# Altium PCB PCB1.PcbDoc
Units mm, origin at the board's own origin, x right, y up, seen from the top; angles counter-clockwise.
Board outline 42.06 x 62 mm, 2 copper layers (Top Layer, Bottom Layer), stack 1.57 mm thick; 55 components, 38 nets, 157 pads, 319 vias.
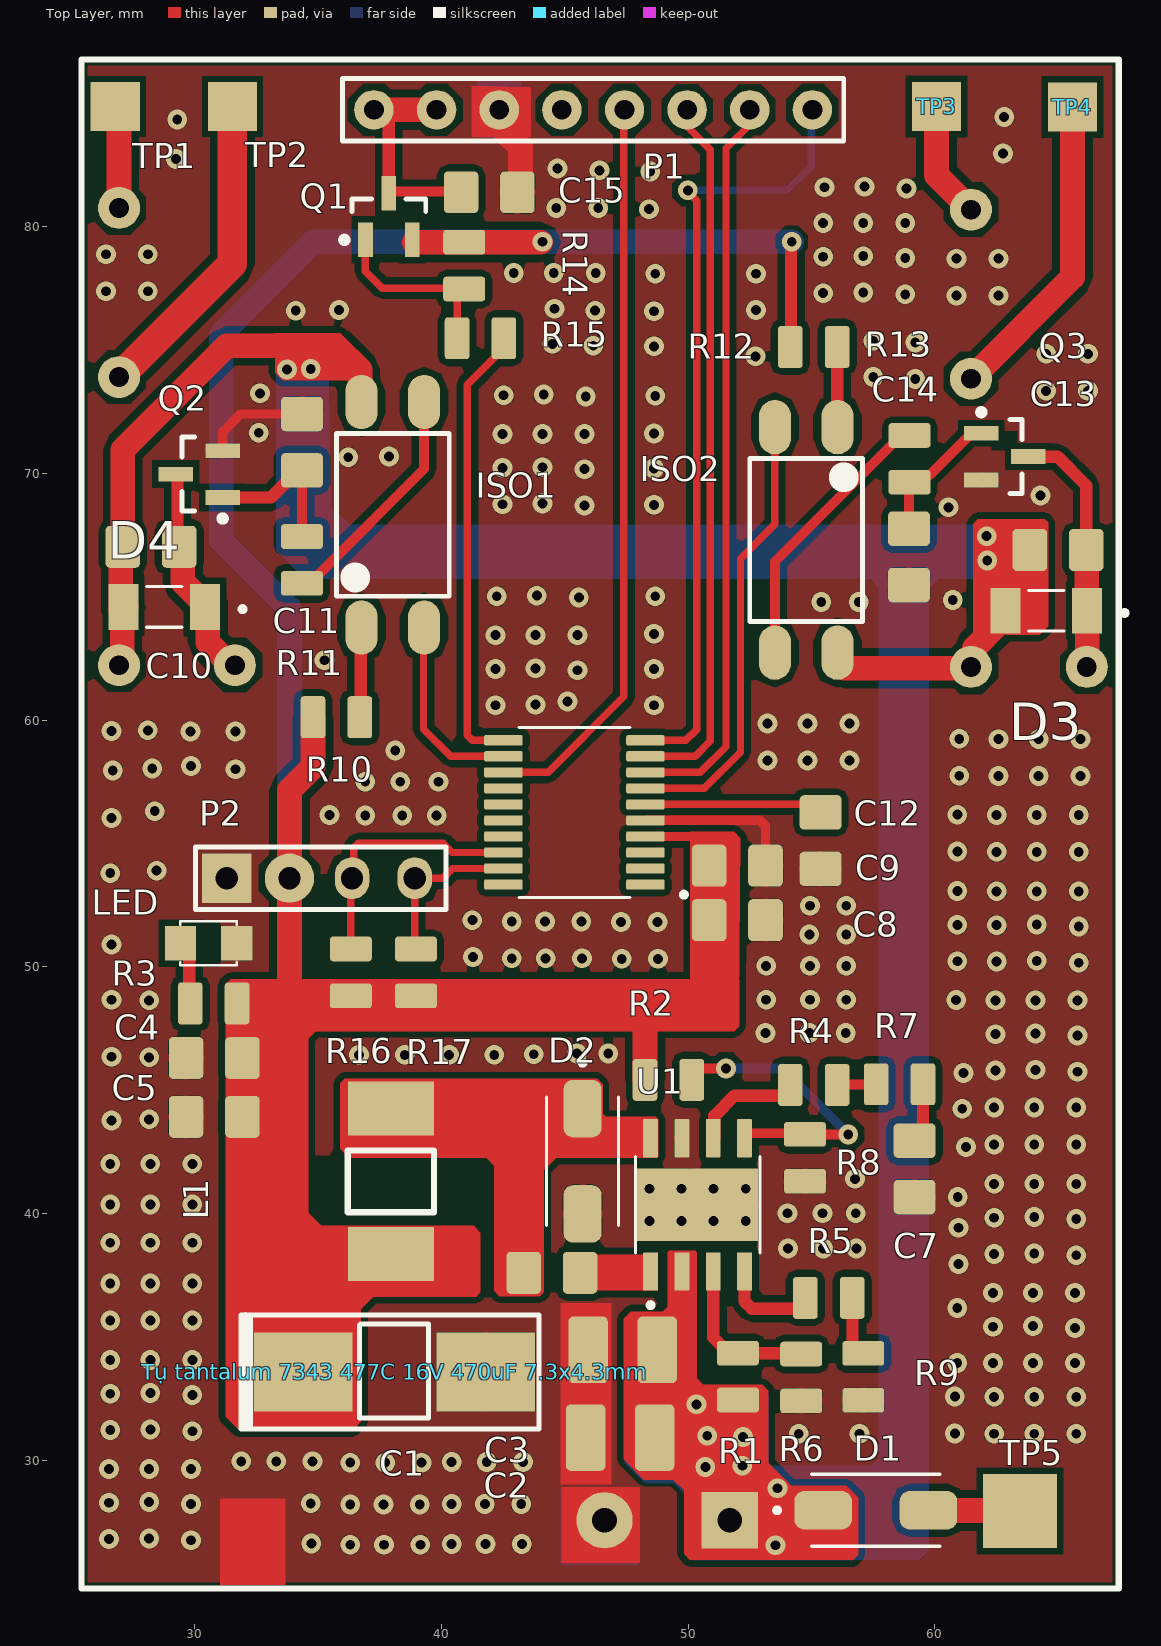
[diagram p0: Top Layer view]
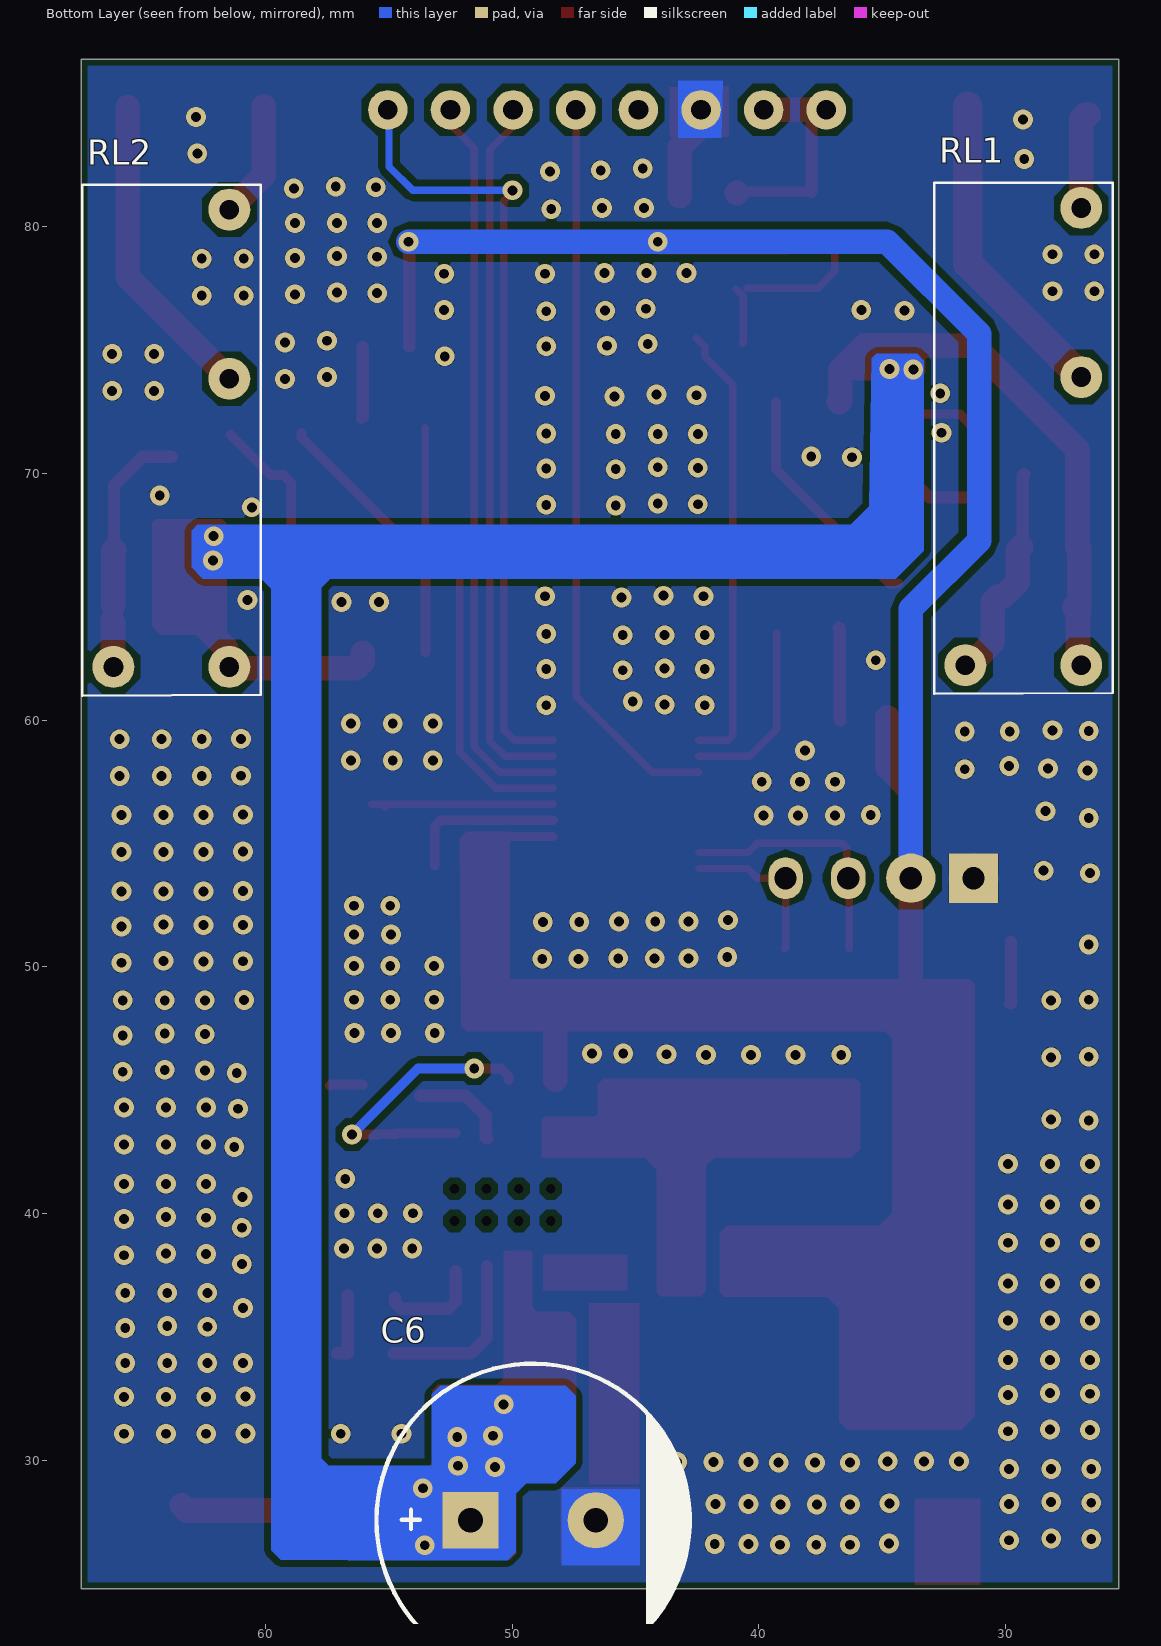
[diagram p1: Bottom Layer view, seen from below]
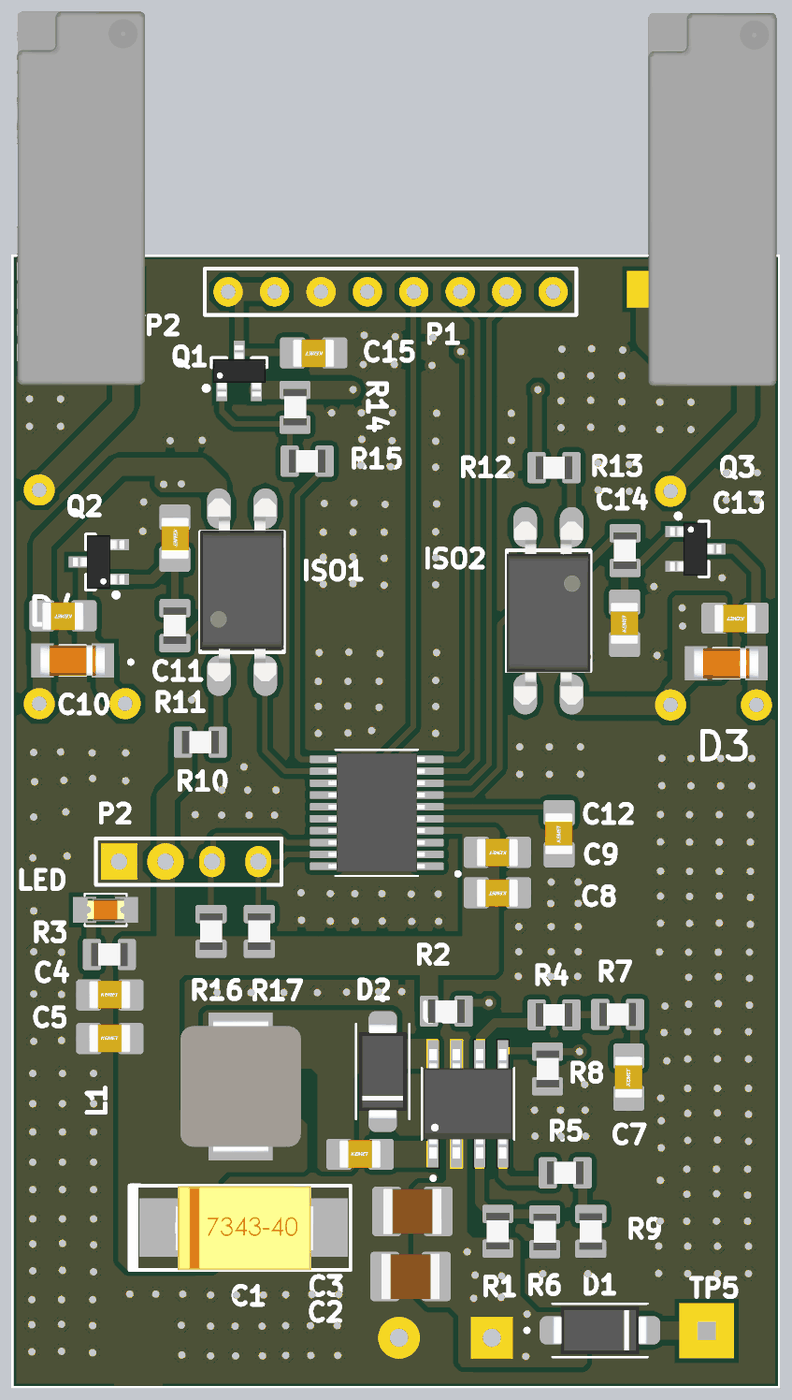
[diagram p2: 3D render of the assembled board from above, using the file's embedded part models]

## Layer stack, top to bottom
Top Solder: solder mask 0.01, Solder Resist, Dk 3.5
Top Layer: signal copper 0.035
Dielectric 1: dielectric 1.5, FR-4, Dk 4.8
Bottom Layer: signal copper 0.035
Bottom Solder: solder mask 0.01, Solder Resist, Dk 3.5

## Board outline
25.4,24.79 67.462,24.79 67.462,86.792 25.425,86.792 25.4,86.79

## Design rules (kind name [scope] priority, off if disabled: settings)
AssemblyTestPointUsage [All] p1: valid=2
AssemblyTestpoint [All] p1: testpointundercomponent=TRUE minsize=1.016 maxsize=2.54 preferedsize=1.524 minholesize=0 maxholesize=1.016 preferedholesize=0.813 testpointgrid=0.025 usegrid=FALSE gridtolerance=0 allowsidetop=TRUE allowsidebottom=TRUE
BoardOutlineClearance [All] p1: gap=0.254 ignorepadtopadclearanceinfootprint=FALSE except(0: Arc-SplitContinuation Track-SplitContinuation SMDPad-SplitContinuation THPad-SplitContinuation Via-SplitContinuation Fill-SplitContinuation Poly-SplitContinuation Region-SplitContinuation Text-SplitContinuation)
Clearance BREAKOUT [WithinRoom('CPU_10')or WithinRoom('CPU_11')or WithinRoom('CPU_12')or WithinRoom('CPU_13')or WithinRoom('CPU_15')or WithinRoom('CPU_16') or WithinRoom('CPU_17')or WithinRoom('CPU_4')or WithinRoom('CPU_7')or WithinRoom('CPU_8') or WithinRoom('CPU_9') or WithinRoom('CPU_3')or WithinRoom('CPU_5')or WithinRoom('CPU1')or WithinRoom('CPU2')] p1: gap=0.076 ignorepadtopadclearanceinfootprint=TRUE except(0.08: SMDPad-Fill SMDPad-Text SMDPad-Hole; 0.102: SMDPad-SMDPad SMDPad-THPad THPad-THPad; 0.114: Arc-Poly Track-SMDPad Track-THPad Track-Fill Track-Poly SMDPad-Via SMDPad-Poly SMDPad-Region THPad-Via THPad-Fill THPad-Poly THPad-Region THPad-Text THPad-Hole Via-Via Via-Region Fill-Poly Poly-Poly Poly-Region Poly-Text Poly-Hole; 0.117: Via-Fill Via-Poly)
Clearance GND_SGND [InNet('ETH1_GND')OR InNet('ETH2_GND') OR InNet('ETH3_GND')OR InNet('ETH4_GND') or InNet('RT_ETH_GND') vs InNet('GND')] p2: gap=0.6 ignorepadtopadclearanceinfootprint=TRUE
Clearance 50Ohm_GND_INNER [OnMid and (InNetClass('50SE') OR InNetClass('RGMII_50SE') OR InNetClass('SDCARD_50ohm')) vs InNet('GND')] p3: gap=0.102 ignorepadtopadclearanceinfootprint=TRUE
Clearance PCIe_85_GND_INNER [InNetClass('PCIE') And  OnMid vs InNet('GND')] p4: gap=0.152 ignorepadtopadclearanceinfootprint=TRUE
Clearance USB_90_GND_INNER [(InNetClass('USB_HS') OR InNetClass('USB_SS')) And  OnMid vs InNet('GND')] p5: gap=0.178 ignorepadtopadclearanceinfootprint=TRUE
Clearance ETH100_GND_INNER [OnMid and InNetClass('Ethernet') vs InNet('GND') or InNet('ETH1_GND')  or InNet('ETH2_GND') or InNet('ETH3_GND') or InNet('ETH4_GND') or InNet('RT_ETH_GND')] p6: gap=0.203 ignorepadtopadclearanceinfootprint=TRUE
Clearance 50Ohm_GND [InNetClass('50SE') OR InNetClass('RGMII_50SE') OR InNetClass('SDCARD_50ohm') vs InNet('GND')] p7: gap=0.127 ignorepadtopadclearanceinfootprint=TRUE
Clearance PCIe_85_GND [InNetClass('PCIE') vs InNet('GND')] p8: gap=0.203 ignorepadtopadclearanceinfootprint=TRUE
Clearance USB_90_GND [InNetClass('USB_HS') OR InNetClass('USB_SS') vs InNet('GND')] p9: gap=0.203 ignorepadtopadclearanceinfootprint=TRUE
Clearance ETH100_GND [InNetClass('Ethernet') vs InNet('GND') or InNet('ETH1_GND')  or InNet('ETH2_GND') or InNet('ETH3_GND') or InNet('ETH4_GND') or InNet('RT_ETH_GND')] p10: gap=0.203 ignorepadtopadclearanceinfootprint=FALSE
Clearance 50Ohm_OTHER_INNER [OnMid and (InNetClass('50SE') OR InNetClass('RGMII_50SE') OR InNetClass('SDCARD_50ohm'))] p11: gap=0.203 ignorepadtopadclearanceinfootprint=TRUE
Clearance PCIe_85_PCIe_85_INNER [InNetClass('PCIE') And  OnMid] p12: gap=0.239 ignorepadtopadclearanceinfootprint=TRUE
Clearance PCIe_85_OTHER_INNER [InNetClass('PCIE') And  OnMid vs Not InNetClass('PCIE')] p13: gap=0.239 ignorepadtopadclearanceinfootprint=TRUE
Clearance USB_90_USB90_INNER [(InNetClass('USB_HS') OR InNetClass('USB_SS')) And  OnMid] p14: gap=0.203 ignorepadtopadclearanceinfootprint=TRUE
Clearance USB_90_OTHER_INNER [(InNetClass('USB_HS') OR InNetClass('USB_SS')) And  OnMid vs Not (InNetClass('USB_HS') OR InNetClass('USB_SS'))] p15: gap=0.203 ignorepadtopadclearanceinfootprint=TRUE
Clearance ETH100_ETH100_INNER [InNetClass('Ethernet') And  OnMid] p16: gap=0.386 ignorepadtopadclearanceinfootprint=TRUE
Clearance ETH100_OTHER_INNER [InNetClass('Ethernet') And  OnMid vs Not InNetClass('Ethernet')] p17: gap=0.386 ignorepadtopadclearanceinfootprint=TRUE
Clearance 50Ohm_OTHER [InNetClass('50SE') OR InNetClass('RGMII_50SE') OR InNetClass('SDCARD_50ohm')] p18: gap=0.345 ignorepadtopadclearanceinfootprint=TRUE
Clearance PCIe_PCIe_85 [InNetClass('PCIE')] p19: gap=0.406 ignorepadtopadclearanceinfootprint=TRUE
Clearance PCIe_85_OTHER [InNetClass('PCIE') vs Not InNetClass('PCIE')] p20: gap=0.406 ignorepadtopadclearanceinfootprint=TRUE
Clearance USB_90_USB90 [InNetClass('USB_HS') OR InNetClass('USB_SS')] p21: gap=0.356 ignorepadtopadclearanceinfootprint=TRUE
Clearance USB_90_OTHER [InNetClass('USB_HS') OR InNetClass('USB_SS') vs Not (InNetClass('USB_HS') OR InNetClass('USB_SS'))] p22: gap=0.356 ignorepadtopadclearanceinfootprint=TRUE
Clearance ETH100_ETH100 [InNetClass('Ethernet')] p23: gap=0.559 ignorepadtopadclearanceinfootprint=TRUE
Clearance ETH100_OTHER [InNetClass('Ethernet') vs Not InNetClass('Ethernet')] p24: gap=0.559 ignorepadtopadclearanceinfootprint=TRUE
Clearance Default [All] p25: gap=0.254 ignorepadtopadclearanceinfootprint=TRUE except(0.279: Region-Region)
ComponentClearance [All] p1: gap=0.3 collisioncheckmode=3 verticalgap=0 showdistances=FALSE donotcheckwithout3dbody=TRUE checkcomponentboundary=TRUE
DiffPairsRouting BREAKOUT_2 [WithinRoom('CPU') or WithinRoom('CPU_1') or WithinRoom('CPU_2') or WithinRoom('CPU_4')or WithinRoom('CPU_6')or WithinRoom('CPU_7')or WithinRoom('CPU_8')or WithinRoom('CPU_9')or WithinRoom('CPU_10')or WithinRoom('CPU_11')or WithinRoom('CPU_12')or WithinRoom('CPU_13')or WithinRoom('CPU_14')or WithinRoom('CPU_15')or WithinRoom('CPU_16')] p1: maxlimit=0.076 minlimit=0.076 mostfreqgap=0.076 toplayer_minwidth=0.076 toplayer_maxwidth=0.203 toplayer_prefwidth=0.076 bottomlayer_minwidth=0.076 bottomlayer_maxwidth=0.203 bottomlayer_prefwidth=0.076 maxuncoupledlength=12.7
DiffPairsRouting 100_OHM_DIFF [InDifferentialPairClass('ETH0_100Diff')] p2: maxlimit=0.152 minlimit=0.152 mostfreqgap=0.152 toplayer_minwidth=0.14 toplayer_maxwidth=0.14 toplayer_prefwidth=0.14 bottomlayer_minwidth=0.14 bottomlayer_maxwidth=0.14 bottomlayer_prefwidth=0.14 maxuncoupledlength=12.7
DiffPairsRouting 90_OHM_DIFF [InDifferentialPairClass('USB_HS_90diff') OR InDifferentialPairClass('USB_sS_90diff')] p3: maxlimit=0.152 minlimit=0.152 mostfreqgap=0.152 toplayer_minwidth=0.178 toplayer_maxwidth=0.178 toplayer_prefwidth=0.178 bottomlayer_minwidth=0.178 bottomlayer_maxwidth=0.178 bottomlayer_prefwidth=0.178 maxuncoupledlength=12.7
DiffPairsRouting 85_OHM_DIFF [InDifferentialPairClass('PCIE_85Diff')] p4: maxlimit=0.152 minlimit=0.152 mostfreqgap=0.152 toplayer_minwidth=0.203 toplayer_maxwidth=0.203 toplayer_prefwidth=0.203 bottomlayer_minwidth=0.203 bottomlayer_maxwidth=0.203 bottomlayer_prefwidth=0.203 maxuncoupledlength=12.7
FabricationTestPointUsage [All] p1: valid=2 allowmultiple=FALSE
FabricationTestpoint [All] p1: side=3 testpointundercomponent=TRUE minsize=0.762 maxsize=2.54 preferedsize=1.524 minholesize=0 maxholesize=1.016 preferedholesize=0.813 testpointgrid=0.025 allowsidetop=TRUE allowsidebottom=TRUE usegrid=FALSE gridtolerance=0
MatchedLengths DiffPair_MatchedLengths [(InNetClass('DDR_100_OHM') or InNetClass('USB2D0') or InNetClass('USBWIFI'))] p1: tolerance=0.3 checknetsindiffpair=TRUE checkdiffpairvsdiffpair=FALSE checkxsignals=FALSE checkothers=FALSE
MinimumSolderMaskSliver [All] p1: minsoldermaskwidth=0.08
PlaneConnect [All] p1: planeconnectstyle=Direct reliefexpansion=0.508 reliefentries=4 reliefconductorwidth=0.254 reliefairgap=0.254
PolygonConnect PolygonConnect_1 [IsNamedPolygon('+12V') OR IsNamedPolygon('VCC')] p1: thpad.connectstyle=Relief thpad.reliefconductorwidth=0.8 thpad.reliefentries=4 thpad.polygonreliefangle="90 Angle" thpad.airgapwidth=0.3 smdpad.connectstyle=Relief smdpad.reliefconductorwidth=0.8 smdpad.reliefentries=4 smdpad.polygonreliefangle="90 Angle" smdpad.airgapwidth=0.3 via.connectstyle=Direct via.reliefconductorwidth=0.8 via.reliefentries=4 via.polygonreliefangle="90 Angle" via.airgapwidth=0.3
PolygonConnect [IsNamedPolygon('GND')] p2: connectstyle=Direct reliefconductorwidth=0.254 reliefentries=4 polygonreliefangle="90 Angle" airgapwidth=0.254
RoutingVias [All] p1: holewidth=0.711 width=1.27 viastyle="Through Hole" minholewidth=0.711 minwidth=1.27 maxholewidth=0.711 maxwidth=1.27 useviatemplates=TRUE viatemplateguid#1={3B5EC6AB-BAA8-48E5-95E5-2F4D0D778E7A} viatemplatename#1=v80h40m0mx0
RoutingVias Via550 [All] p2: holewidth=0.25 width=0.55 viastyle="Through Hole" minholewidth=0.25 minwidth=0.55 maxholewidth=0.25 maxwidth=0.55
SilkToSilkClearance [All] p1: silktosilkclearance=0.2
SilkToSolderMaskClearance [IsPad] p1: minsilkscreentomaskgap=0.01 clearancetoexposedcopper=TRUE
SolderMaskExpansion [IsVia] p1: expansion=0.1 istentingtop=TRUE soldermaskfromhole=TRUE
ViasUnderSMD [All] p1: allowed=FALSE
Width BREAKOUT_1 [WithinRoom('CPU') or WithinRoom('CPU_1') or WithinRoom('CPU_2') or WithinRoom('CPU_3') or WithinRoom('CPU_4') or WithinRoom('CPU_5')or WithinRoom('CPU_6')or WithinRoom('CPU_7')or WithinRoom('CPU_8')or WithinRoom('CPU_9')or WithinRoom('CPU_10')or WithinRoom('CPU_11')or WithinRoom('CPU_12')or WithinRoom('CPU_13')or WithinRoom('CPU_14')or WithinRoom('CPU_15')or WithinRoom('CPU_16')] p1: maxlimit=0.6 minlimit=0.089 preferedwidth=0.15 minimp=50.000000 maximp=50.000000 favimp=50.000000
Width 50_OHM [(InNetClass('50SE') Or InNetClass('RGMII_50SE') or InNetClass('SDCARD_50ohm'))] p2: maxlimit=0.2 minlimit=0.076 preferedwidth=0.173 bottomlayer_maxwidth=0.173 minimp=50.000000 maximp=50.000000 favimp=50.000000
Width [All] p3: maxlimit=10 minlimit=0.254 preferedwidth=0.254
20 further rules are at their usual default settings.

## Components (designator, comment, footprint, x,y, rotation, side; value= is the part's Value field where it differs from the comment)
C1 "C0805" CAP_0805 44.475,37.592 r0 top
C2 "C1210" CAP_1210 47.241,30.912 r0 top
C3 "C1210" CAP_1210 47.346,34.468 r0 top
C4 "C0805" CAP_0805 30.785,46.304 r0 top
C5 "C0805" CAP_0805 30.785,43.917 r0 top
C6 "100uF" "TU HOA 1000uF/25V,50V" 51.689,27.559 r180 bottom
C7 "C0805" CAP_0805 59.182,41.808 r90 top
C8 "C0805" CAP_0805 51.994,51.892 r180 top
C9 "C0805" CAP_0805 51.994,54.102 r180 top
C10 "100uF" CAP_0805 28.219,67.031 r180 top
C11 "100uF" CAP_0805 34.341,71.272 r270 top
C12 "C0805" CAP_0805 55.372,55.118 r90 top
C13 "100uF" CAP_0805 64.999,66.904 r180 top
C14 "100uF" CAP_0805 58.953,66.624 r90 top
C15 "100uF" CAP_0805 41.935,81.407 r180 top
D1 "B340A-13" B340A 57.607,27.965 r0 top
D2 "B340A-13" B340A 45.72,42.115 r270 top
D3 "1N4148" "DIODE SMA 1" 64.516,64.44 r180 top
D4 "1N4148" "DIODE SMA 1" 28.753,64.592 r180 top
ISO1 "OPTO" "PC817 SMD" 38.024,68.326 r90 top value=TLP5211
ISO2 "OPTO" "PC817 SMD" 54.788,67.31 r270 top value=TLP5211
L1 "ETQ-P4M*KVK" "ind 7x7x4" 37.948,41.3 r270 top
LED "LED_0805_RED" LED-0805-Red 29.413,50.952 r0 top
P1 "Header 8" HDR1X8 37.26,84.75 r0 top locked
P2 "Header 4H" HDR1X4 31.293,53.594 r0 top
Q1 "IRLML6401" "SOT23 - 3PIN" 37.861,80.427 r90 top
Q2 "NPN-SOT23" "SOT23 - 3PIN" 30.175,69.977 r180 top
Q3 "NPN-SOT23" "SOT23 - 3PIN" 62.84,70.688 r0 top
R1 "R0805" RES_0805 52.019,33.386 r270 top
R2 "R0805" RES_0805 49.2,45.415 r180 top
R3 "R0805" RES_0805 30.759,48.514 r0 top
R4 "R0805" RES_0805 55.093,45.212 r180 top
R5 "R0805" RES_0805 55.702,36.576 r180 top
R6 "R0805" RES_0805 54.585,33.35 r90 top
R7 "R0805" RES_0805 58.572,45.237 r180 top
R8 "R0805" RES_0805 54.737,42.255 r90 top
R9 "R0805" RES_0805 57.099,33.376 r90 top
R10 "R0805" RES_0805 35.738,60.122 r180 top
R11 "R0805" RES_0805 34.341,66.497 r270 top
R12 "R0805" RES_0805 55.093,75.133 r180 top
R13 "R0805" RES_0805 58.979,70.597 r90 top
R14 "R0805" RES_0805 40.919,78.435 r270 top
R15 "R0805" RES_0805 41.58,75.489 r180 top
R16 "R0805" RES_0805 36.322,49.774 r270 top
R17 "R0805" RES_0805 38.964,49.774 r270 top
RL1 "RelayHF46" "Relay 4 chan HF46F" 26.923,62.23 r270 bottom
RL2 "RelayHF46" "Relay 4 chan HF46F" 61.468,62.161 r270 bottom
TP1 "Pad" PAD_SQ_2MM#1 26.772,84.887 r0 top
TP2 "Pad" PAD_SQ_2MM#1 31.521,84.887 r0 top
TP3 "Pad" PAD_SQ_2MM#1 60.071,84.887 r0 top
TP4 "Pad" PAD_SQ_2MM#1 65.583,84.861 r0 top
TP5 "Pad" PAD_SQ_2MM#2 63.449,27.94 r0 top
"Tụ tantalum 7343 477C 16V 470uF 7.3x4.3mm" "C" "tu tantalum smd7343" 38.1,33.579 r0 top
U1 "TPS54360" TPS5430DDAR 50.383,40.35 r90 top
? "STM32G030F6" SOP65P640X120-20N 45.39,56.261 r180 top

## Footprints (in the part's own frame and the unit in brackets; to place one, negate y for a bottom-side part, rotate by r counter-clockwise, add the part's x,y. Pads: shape width x height; smd on the part's side, far side on the other; paste and mask are expansions set on the pad)
B340A [mm]
  rrect50% 2.33x1.55 smd: A(2.135,0) C(-2.135,0)
  silkscreen extent -4.1,-1.46 2.6,1.46, body extent -2.6,-1.3 2.6,1.3, height 2.4
CAP_0805 [mm]
  rrect25% 1.4x1.7 smd: 1(-1.143,0) 2(1.143,0)
  body extent -1.15,-0.76 1.15,0.79, height 1.01
CAP_1210 [mm]
  rrect25% 1.6x2.7 smd: 1(-1.4,0) 2(1.4,0)
  body extent -1.6,-1.25 1.6,1.25, height 2.5
"DIODE SMA 1" [mm]
  rect 1.22x1.85 smd: 1(1.655,0) 2(-1.655,0)
  silkscreen extent -3.28,-0.82 0.71,0.82, body extent -1.75,-0.85 1.75,0.85, height 1.7
HDR1X4 [mm] "Connector; Header; 4 Position"
  rect 2x2 hole 0.9: 1(0,0)
  round 2 hole 0.9: 2(2.54,0)
  oval 1.4x1.7 hole 0.9: 3(5.08,0) 4(7.62,0)
  silkscreen extent -1.27,-1.27 8.89,1.27, body extent -1.27,-1.27 8.89,1.27, height 7
HDR1X8 [mm] "Connector; Header; 8 Position"
  round 1.6 hole 0.8: 1(0,0) 2(2.54,0) 3(5.08,0) 4(7.62,0) 5(10.16,0) 6(12.7,0) 7(15.24,0) 8(17.78,0)
  silkscreen extent -1.27,-1.27 19.05,1.27
"ind 7x7x4" [mm]
  rect 2.2x3.5 smd: 1(-2.95,0) 2(2.95,0)
  silkscreen extent -1.25,-1.75 1.25,1.75, body extent -3.6,-3.3 3.6,3.3, height 2.8
LED-0805-Red [mil]
  rect 50x55 smd: 1(0,0) 2(90,0)
  silkscreen extent 0,-35 90,35, body extent 5,-25 85,25, height 43
PAD_SQ_2MM#1 [mm]
  rect 2x2 smd paste-1: 1(0,0)
PAD_SQ_2MM#2 [mm]
  rect 3x3 smd paste-1: 1(0,0)
"PC817 SMD" [mm] "SMD"
  oval 2.2x1.3 smd: 1(-4.572,1.27) 2(-4.572,-1.27) 3(4.572,-1.27) 4(4.572,1.27)
  silkscreen extent -3.3,-2.29 3.3,2.29, body extent -4.87,-2.29 5.13,2.29, height 3.95
"Relay 4 chan HF46F" [mm]
  round 1.7 hole 0.8: 1(0,0) 2(0,-4.7) 3(-11.684,0) 4(-18.542,0)
  silkscreen extent -19.56,-5.97 1.16,1.27, body extent -19.38,-5.79 1.02,1.22, height 3.42
RES_0805 [mm]
  rrect25% 1x1.7 smd: 1(-0.95,0) 2(0.95,0)
  body extent -1,-0.63 1,0.63, height 0.47
SOP65P640X120-20N [mm]
  rrect25% 1.56x0.41 smd: 1(-2.88,2.925) 2(-2.88,2.275) 3(-2.88,1.625) 4(-2.88,0.975) 5(-2.88,0.325) 6(-2.88,-0.325) 7(-2.88,-0.975) 8(-2.88,-1.625) 9(-2.88,-2.275) 10(-2.88,-2.925) 11(2.88,-2.925) 12(2.88,-2.275) 13(2.88,-1.625) 14(2.88,-0.975) 15(2.88,-0.325) 16(2.88,0.325) 17(2.88,0.975) 18(2.88,1.625) 19(2.88,2.275) 20(2.88,2.925)
  silkscreen extent -4.54,-3.45 2.25,3.45, body extent -3.2,-3.25 3.2,3.25, height 0.53
"SOT23 - 3PIN" [mm]
  rect 1.4x0.6 smd: 1(-0.95,0.95) 2(-0.95,-0.95) 3(0.95,0)
  silkscreen extent -1.07,-1.5 0.7,1.92, body extent -1.4,-1.45 1.4,1.45, height 1.29
TPS5430DDAR [mm]
  rrect10% 1.55x0.6 smd mask+0: 1(-2.7,1.905) 2(-2.7,0.635) 3(-2.7,-0.635) 4(-2.7,-1.905) 5(2.7,-1.905) 6(2.7,-0.635) 7(2.7,0.635) 8(2.7,1.905)
  rect 2.95x4.9 smd paste-3 mask+0: 9(0,0)
  round 0.3 hole 0.4 mask+0: 10(-0.65,1.95) 11(0.65,1.95) 12(-0.65,0.65) 13(0.65,0.65) 14(-0.65,-0.65) 15(0.65,-0.65) 16(-0.65,-1.95) 17(0.65,-1.95)
  silkscreen extent -4.17,-2.52 1.95,2.52, body extent -3,-2.45 3,2.45, height 1.7
"TU HOA 1000uF/25V,50V" [mil] "Tu hoa 1000uF/25V,50V"
  rect 90x90 hole 39.37: 1(0,0)
  round 90 hole 39.37: 2(200,0)
  silkscreen extent -150,-250 350,250
"tu tantalum smd7343" [mm]
  rect 4x3.2 smd: 1(-3.7,0) 2(3.7,0)
  silkscreen extent -6.23,-2.31 5.85,2.31, body extent -3.75,-2.33 3.85,2.27, height 3.99

## Part data
C1 C4 C5 C7 C8 C9 C10 C11 C12 C13 C14 C15: library part CAP_0805, "Capacitor SMD 0805"
C2 C3: library part CAP_1210, "Capacitor SMD 1210"
C6: library part CAPACITOR
D1 D2: "Diode Schottky 40 V 3A Surface Mount SMA", Package="DO-214 Diodes Inc.", Availability="In Stock", Check_prices=https://www.snapeda.com/parts/B340A-13/Diodes+Inc./view-part/?ref=eda, MF="Diodes Inc.", MP=B340A-13, Price=None, Purchase-URL=https://pricing.snapeda.com/search/part/B340A-13/?ref=eda, SnapEDA_Link=https://www.snapeda.com/parts/B340A-13/Diodes+Inc./view-part/?ref=snap
D3 D4: "DIODE, 1N4148 AMMO-BOX 5K; Diode Type: Small Signal; Voltage, Vrrm: 100V; Current, If AV: 150mA; Current, Ifsm: 2000A...", Package="DO-204 Multicomp", Check_prices=https://www.snapeda.com/parts/1N4148/Multicomp/view-part/?ref=eda, MF=Multicomp, MP=1N4148, SnapEDA_Link=https://www.snapeda.com/parts/1N4148/Multicomp/view-part/?ref=snap
L1: library part IND, "Inductor Power SMD PCC-M0840M-LP Series", Manufacturer=Panasonic, Manufacturer Part Number=ETQ-P4M*KVK
R1 R2 R3 R4 R5 R6 R7 R8 R9 R10 R11 R12 R13 R14 R15 R16 R17: library part RES_0805, "Resistor SMD 0805"
RL1 RL2: library part "Relay 4 chan HF46F", "Relay 4 chan HF46F", Ma_Hang=MH003879, Ten="Relay 5V5A HF46F-G 5-HS1"
TP1 TP2 TP3 TP4 TP5: library part PAD_SQ_2MM, "Test Point Square 2mm"
"Tụ tantalum 7343 477C 16V 470uF 7.3x4.3mm": library part "CAP 477C"
P1 P2: LatestRevisionDate=17-Jul-2002, LatestRevisionNote="Re-released for DXP Platform.", Publisher="Altium Limited"

## Via types
v1: diameter 0.8, hole 0.4, Top Layer to Bottom Layer, tented both sides, 319 vias

## Nets (pads, with @x,y where several pads share a name; then routed paths per layer and width w, separated by ;. In a path a pad name is that pad's centre, name@x,y a point inside that pad or via, vN(x,y) a via of type N, cw(c..) or ccw(c..) an arc to the next point about the centre after c; other vN are vias at no path point)
+3.3V: "Tụ tantalum 7343 477C 16V 470uF 7.3x4.3mm.1" ?.4 C4.2 C5.2 C8.2 C9.2 L1.2 P2.2 Q1.2 R2.2 R3.2 R10.2 R12.2 R14.1 R16.2 R17.2 | length 81.2
  Top Layer w0.35: ?.4@48.34,55.286 50.429,55.286 50.495,55.22 ; 51.105,55.27 51.156,55.27 51.156,52.857 ; 51.181,52.857 51.181,48.565 51.257,48.565 ; C9.2@51.486,53.823 C9.2@51.486,54.077
  Top Layer w0.4: R12.2 R12.2@54.173,75.164 ; v1@54.173,79.37 v1(54.204,79.4)
  Top Layer w0.5: 33.68,48.565 33.833,48.565 ; R12.2@54.173,75.164 v1@54.173,79.37
  Top Layer w1: 33.833,48.565 33.833,57.15 34.788,58.105 R10.2 ; Q1.2@38.903,79.385 R14.1 v1@44.018,79.385 ; R2.2 48.25,47.934
  Bottom Layer w1: P2.2 33.833,64.516 31.064,67.285 31.064,75.667 34.798,79.4 v1(44.094,79.4) v1(54.204,79.4)
+12: C2.2 C3.2 C6.1 C10.2 C13.2 D1.C D3.1 D4.1 ISO1.4 ISO2.4 R1.2 RL1.1 RL2.1 U1.2 | length 46.5
  Top Layer w0.3: C2.2 48.717,30.988 v1(50.775,30.988) ; U1.2 49.748,36.066 49.572,35.89 49.396,35.714 49.396,35.695 49.345,35.644 49.345,35.067 C3.2 48.746,33.891 49.396,33.241 49.396,33.205 50.241,32.36 v1(50.343,32.258) 51.841,32.258 R1.2 ; v1(53.619,28.854) 53.715,28.759 54.16,28.759 54.586,28.333 55.105,28.333 D1.C
  Top Layer w1: RL1.1 27.057,62.364 27.057,64.441 D4.1@27.208,64.592 ; D4.1@26.998,64.416 26.998,66.952 C10.2 27.076,70.968 31.293,75.184 35.717,75.184 36.696,74.205 36.696,72.955 ISO1.4 ; ISO2.4 56.058,62.369 56.324,62.103 RL2.1@61.62,62.103 ; RL2.1@61.515,62.208 61.602,62.295 61.602,62.923 62.643,63.964 62.776,63.964 D3.1@62.776,64.097 ; D3.1@62.776,64.389 D3.1@62.964,64.577 ; D3.1@62.886,64.389 62.964,64.467 62.964,65.968 63.55,66.554 63.656,66.554 63.856,66.754 C13.2
  other v1: 53.543,26.543 50.698,29.718 52.197,29.769 52.222,30.937 62.128,66.472 62.103,67.462 33.731,74.219 34.696,74.244
GND: "Tụ tantalum 7343 477C 16V 470uF 7.3x4.3mm.2" ?.5 C2.1 C3.1 C4.1 C5.1 C6.2 C7.1 C8.1 C9.1 C11.1 C12.1 C14.1 C15.1 D2.A LED.2 P1.3 P2.1 Q2.2 Q3.2 R6.1 R8.1 R9.1 U1.7 U1.9 | length 14.7
  Top Layer w0.381: Q2.2 31.125,71.689 31.852,72.415 C11.1 ; ?.5@48.34,55.936 52.914,55.936 53.137,55.713 C9.1 ; C14.1 C14.1@59.004,65.532
  Top Layer w1: P1.3 42.531,84.559 42.531,83.91 43.205,83.236 C15.1@43.205,81.255
  other v1: 36.297,26.568 37.668,26.568 39.141,26.568 40.411,26.594 41.783,26.594 43.256,26.594 34.722,26.619 29.845,26.746 26.518,26.797 28.143,26.822 36.297,28.194 37.643,28.194 39.116,28.194 29.845,28.219 40.411,28.219 41.758,28.219 43.231,28.219 34.696,28.245 26.518,28.27 28.143,28.296 26.518,29.642 28.143,29.642 29.845,29.642 36.297,29.896 37.719,29.896 39.192,29.896 40.411,29.921 41.834,29.921 43.307,29.921 31.877,29.947 33.299,29.947 34.773,29.947 54.483,31.064 56.947,31.064 60.815,31.076 62.408,31.064 64.033,31.064 65.735,31.064 29.896,31.166 26.568,31.217 28.194,31.242 60.815,32.575 62.408,32.563 64.033,32.563 65.735,32.563 29.896,32.639 26.568,32.69 28.194,32.715 60.909,33.934 62.357,33.934 63.983,33.934 65.684,33.934 26.568,34.061 28.194,34.061 29.896,34.061 65.684,35.357 62.357,35.408 63.983,35.433 26.568,35.662 28.194,35.662 29.896,35.662 60.909,36.17 62.357,36.779 63.983,36.779 65.684,36.779 26.568,37.16 28.194,37.16 29.896,37.16 60.96,37.948 65.735,38.303 62.408,38.354 64.033,38.379 54.051,38.583 55.474,38.583 56.82,38.583 26.568,38.811 28.194,38.811 29.896,38.811 60.96,39.421 65.735,39.776 62.408,39.827 64.033,39.853 54.026,40.005 55.448,40.005 56.794,40.005 26.568,40.361 28.194,40.361 29.896,40.361 60.935,40.665 62.408,41.199 64.033,41.199 65.735,41.199 56.769,41.402 26.568,42.012 28.194,42.012 29.896,42.012 61.265,42.697 62.408,42.799 64.033,42.799 65.735,42.799 26.619,43.764 28.143,43.815 61.112,44.247 62.408,44.298 64.033,44.298 65.735,44.298 61.163,45.695 65.786,45.745 62.459,45.796 64.084,45.822 28.143,46.33 26.619,46.355 36.652,46.431 38.506,46.431 40.31,46.431 42.139,46.431 43.739,46.457 45.491,46.482 46.761,46.482 65.786,47.219 62.459,47.269 64.084,47.295 53.137,47.32 54.915,47.32 56.388,47.32 28.143,48.641 60.866,48.653 62.459,48.641 64.084,48.641 65.786,48.641 26.619,48.666 53.162,48.666 54.94,48.666 56.413,48.666 53.162,50.038 54.94,50.038 56.413,50.038 65.837,50.165 60.917,50.228 62.509,50.216 64.135,50.241 47.306,50.322 48.779,50.322 42.85,50.343 44.221,50.343 45.695,50.343 41.275,50.394 26.619,50.902 54.915,51.308 56.413,51.308 65.837,51.638 60.917,51.701 62.509,51.689 64.135,51.714 47.28,51.821 48.754,51.821 42.85,51.841 44.196,51.841 45.669,51.841 41.25,51.892 54.94,52.476 56.413,52.476 60.917,53.072 62.509,53.061 64.135,53.061 65.837,53.061 26.568,53.797 28.448,53.899 60.917,54.673 62.509,54.661 64.135,54.661 65.837,54.661 26.619,56.032 36.906,56.134 38.405,56.134 39.802,56.134 35.458,56.159 60.917,56.171 62.509,56.159 64.135,56.159 65.837,56.159 28.372,56.312 36.906,57.506 38.329,57.506 39.878,57.506 60.993,57.746 62.586,57.734 64.211,57.734 65.913,57.734 26.67,57.963 31.648,58.014 28.27,58.039 29.845,58.141 53.213,58.369 54.839,58.369 56.54,58.369 38.125,58.776 60.993,59.245 62.586,59.233 64.211,59.233 65.913,59.233 29.82,59.538 31.648,59.538 26.619,59.563 28.092,59.588 53.213,59.868 54.839,59.868 56.54,59.868 42.189,60.604 48.616,60.604 43.815,60.63 45.11,60.757 45.517,62.027 42.189,62.078 48.616,62.078 43.815,62.103 35.255,62.433 42.189,63.449 43.815,63.449 45.517,63.449 48.616,63.5 55.397,64.795 56.919,64.797 60.731,64.872 45.568,64.973 42.24,65.024 48.666,65.024 43.866,65.049 60.554,68.631 45.796,68.707 48.616,68.732 42.469,68.758 44.094,68.783 64.287,69.113 45.796,70.18 48.616,70.206 42.469,70.231 44.094,70.256 36.22,70.663 37.871,70.688 42.469,71.603 44.094,71.603 45.796,71.603 48.616,71.628 32.588,71.653 45.847,73.127 48.666,73.152 42.52,73.177 44.145,73.203 32.639,73.254 64.516,73.355 66.218,73.355 59.207,73.838 57.506,73.914 52.73,74.752 64.516,74.854 66.218,74.854 48.616,75.159 46.152,75.184 44.501,75.26 59.207,75.311 57.506,75.387 48.616,76.581 34.087,76.606 46.228,76.606 35.839,76.632 52.756,76.632 44.577,76.683 60.884,77.216 62.586,77.216 58.801,77.267 55.474,77.318 57.099,77.343 26.391,77.394 28.092,77.394 48.666,78.105 52.756,78.105 42.926,78.13 44.552,78.13 46.253,78.13 60.884,78.715 62.586,78.715 58.801,78.74 55.474,78.791 57.099,78.816 26.391,78.892 28.092,78.892 55.474,80.162 57.099,80.162 58.801,80.162 48.412,80.721 44.653,80.772 46.355,80.772 58.852,81.559 55.524,81.61 57.15,81.636 48.463,82.245 46.406,82.296 44.704,82.372 29.235,82.753 62.763,82.982 29.286,84.353 62.814,84.455
MISO: ?.13 P1.5 | length 30
  Top Layer w0.3: ?.13@42.44,57.886 44.322,57.886 47.396,60.96 P1.5@47.396,84.684
MOSI: ?.9 P1.6 | length 28.8
  Top Layer w0.3: ?.9@48.34,58.536 50.281,58.536 50.902,59.157 50.902,83.134 49.96,84.076 P1.6
Net_6: ?.6 C12.2 | length 7.5
  Top Layer w0.3: ?.6@48.34,56.586 C12.2@55.697,56.586 ; C12.2@55.138,56.459 C12.2@55.27,56.591
NetC1_1: C1.1 D2.C L1.1 U1.8
NetC1_2: C1.2 U1.1
NetC7_2: C7.2 R7.1 | length 2.3
  Top Layer w0.5: C7.2@59.522,42.981 R7.1
NetC10_1: C10.1 D4.2 Q2.3 RL1.2 | length 8.7
  Top Layer w0.5: Q2.3 29.244,69.977 29.294,69.927 29.294,67.455 C10.1@29.439,67.31
  Top Layer w1: C10.1 29.504,66.889 29.504,65.603 30.089,65.017 30.298,65.017 30.518,64.797 30.518,63.166 31.454,62.23 RL1.2
NetC11_2: C11.2 Q2.1 R11.1 | length 5.8
  Top Layer w0.4: R11.1 C11.2@34.341,69.901
  Top Layer w0.5: Q2.1 33.088,69.027 33.962,69.901 C11.2@34.087,69.901
NetC13_1: C13.1 D3.2 Q3.3 RL2.2 | length 9.2
  Top Layer w0.5: Q3.3 64.972,70.688 66.142,69.518 C13.1@66.142,67.254
  Top Layer w1: C13.1 66.169,66.876 D3.2@66.169,64.641 ; RL2.2 66.182,62.175 66.182,63.972 D3.2@66.218,64.008
NetC14_2: C14.2 Q3.1 R13.1 | length 5.4
  Top Layer w0.4: C14.2@58.776,67.589 C14.2 58.953,69.621 R13.1 59.279,69.947 59.798,69.947 61.417,71.566 Q3.1@61.417,71.577
NetISO1_1: ISO1.1 R10.1 | length 3.8
  Top Layer w0.508: R10.1@36.703,59.995 36.721,60.013 36.721,63.721 ISO1.1
NetISO1_3: ISO1.3 R11.2 | length 9.6
  Top Layer w0.4: R11.2 34.691,65.547 34.991,65.847 34.991,65.877 39.294,70.18 ISO1.3
NetISO2_1: ISO2.1 R12.1 | length 3
  Top Layer w0.4: R12.1 R12.1@56.05,75.126 ; ISO2.1@56.05,72.296 ISO2.1@56.134,72.212
  Top Layer w0.5: ISO2.1@56.05,72.296 R12.1@56.05,75.126
NetISO2_3: ISO2.3 R13.2 | length 11
  Top Layer w0.4: ISO2.3 53.518,66.436 58.547,71.465 R13.2@58.547,71.653
NetLED_1: LED.1 R3.1 | length 2.6
  Top Layer w0.5: LED.1@29.769,51.029 29.769,48.514 R3.1
NetQ1_1: Q1.1 R14.2 R15.2 | length 7.4
  Top Layer w0.3: Q1.1 36.911,78.202 37.592,77.521 R14.2@40.462,77.521 ; R15.2@40.665,75.286 40.63,75.321 R15.2 40.63,77.196 R14.2
NetR1_1: R1.1 R6.2 U1.3 | length 6.9
  Top Layer w0.5: U1.3@51.018,37.853 51.018,34.977 51.669,34.326 R6.2@54.803,34.326
NetR2_1: R2.1 R8.2 U1.5 | length 11.9
  Top Layer w0.4: R2.1 50.15,45.572 50.45,45.872 v1(51.537,45.872) ; U1.5@52.288,43.253 54.737,43.253 R8.2 55.387,43.231 55.387,43.205 v1(56.49,43.205)
  Bottom Layer w0.4: v1(51.537,45.872) 53.823,45.872 v1@56.439,43.256
NetR4_1: R4.1 R7.2 | length 1.4
  Top Layer w0.4: R4.1 56.055,45.225 57.34,45.225 R7.2@57.379,45.187
NetR4_2: R4.2 U1.6 | length 3.9
  Top Layer w0.508: U1.6 51.064,43.096 51.064,43.959 51.885,44.78 R4.2@53.722,44.78
NetR5_1: R5.1 R9.2 | length 2.8
  Top Layer w0.5: R5.1@56.667,36.678 56.667,34.326 R9.2
NetR5_2: R5.2 U1.4 | length 4.1
  Top Layer w0.5: U1.4 52.288,36.435 52.581,36.142 54.502,36.142 54.752,36.392 R5.2
NetRL1_3: RL1.3 TP2.1 | length 12.9
  Top Layer w1.2: RL1.3 31.521,78.512 TP2.1
NetRL1_4: RL1.4 TP1.1 | length 4
  Top Layer w1: TP1.1@26.619,84.557 26.753,84.557 26.923,84.387 RL1.4
NetRL2_3: RL2.3 TP4.1 | length 12.7
  Top Layer w1: RL2.3 65.583,77.959 TP4.1
NetRL2_4: RL2.4 TP3.1 | length 4.8
  Top Layer w1: TP3.1 60.071,82.1 RL2.4
PWRC522: ?.11 R15.1 | length 18.2
  Top Layer w0.3: ?.11@42.44,59.186 41.246,59.186 41.046,59.385 41.046,73.609 42.18,74.743 42.18,75.139 R15.1
RL1: ?.12 ISO1.2 | length 7.5
  Top Layer w0.3: ISO1.2@39.268,63.551 39.268,59.639 40.372,58.536 ?.12@42.44,58.536
RL2: ?.7 ISO2.2 | length 18.1
  Top Layer w0.3: ?.7@48.34,57.236 50.657,57.236 52.121,58.699 52.121,66.548 53.518,67.945 ISO2.2@53.518,71.857
SCK: ?.8 P1.7 | length 29.8
  Top Layer w0.3: ?.8@48.34,57.886 50.495,57.886 51.537,58.928 51.537,83.185 52.527,84.176 P1.7@52.527,84.658
SS: ?.10 P1.8 | length 31.8
  Top Layer w0.3: ?.10@48.34,59.186 49.909,59.186 50.343,59.62 50.343,81.057 49.987,81.413 v1(49.987,81.483)
  Bottom Layer w0.3: v1(49.987,81.483) 54.026,81.483 54.991,82.448 P1.8@54.991,84.658
SWCLK: ?.19 P2.4 R17.1 | length 6.5
  Top Layer w0.3: P2.4@38.913,53.518 38.913,50.775 R17.1 ; P2.4 40.056,53.594 40.448,53.986 ?.19@42.44,53.986
SWDIO: ?.18 P2.3 R16.1 | length 10.2
  Top Layer w0.3: R16.1 P2.3@36.322,53.594 ; P2.3@36.398,53.696 36.437,53.734 36.437,54.827 36.612,55.003 40.064,55.003 40.431,54.636 ?.18@42.44,54.636
VCC: D1.A TP5.1 | length 3.8
  Top Layer w1: D1.A 59.755,27.953 63.182,27.953 TP5.1@63.398,28.169
VCC_RC522: C15.2 P1.1 P1.2 Q1.3 | length 8.2
  Top Layer w0.4: P1.1@37.861,84.811 P1.1@37.922,84.811 ; Q1.3@37.897,81.432 40.792,81.432 C15.2
  Top Layer w0.5: Q1.3@37.861,81.432 P1.1@37.861,84.811
  Top Layer w1: P1.1@37.922,84.75 P1.2 ; C15.2@40.889,81.377 C15.2@40.894,81.382
pads on no net: ?.1 ?.2 ?.3 ?.14 ?.15 ?.16 ?.17 ?.20 P1.4 U1.10 U1.11 U1.12 U1.13 U1.14 U1.15 U1.16 U1.17

## Polygon pours and split planes (outlines as drawn)
GND on Bottom Layer "NONET_L01_P-001" (solid, remove dead copper, pour order 1): 20.015,92.329 20.015,18.72 77.495,18.72 77.495,92.329
GND on Top Layer "NONET_L01_P-001" (solid, remove dead copper, pour order 2): 18.796,92.278 18.796,14.224 74.727,14.224 74.727,91.846 72.009,91.846

## Other copper
Top Layer:
  rectangle net GND: 43.358,83.947 43.586,84.023
  rectangle net GND: 44.831,29.007 46.888,36.373
  rectangle net GND: 31.013,24.943 33.68,28.448
  rectangle net NetC1_2: 45.314,36.881 48.746,38.329
  pour cut-out: 37.313,78.562 38.303,78.562 38.303,80.594 37.389,80.594 37.389,80.467
  region net GND: 41.224,85.725 41.224,83.668 43.612,83.668 43.612,85.674 43.409,85.674
  region net GND: 48.031,28.905 44.882,28.905 44.882,25.832 48.031,25.832
  pour cut-out: 62.281,71.73 62.281,70.917 63.373,70.917 63.373,71.73
  pour cut-out: 30.124,51.892 30.963,51.892 30.963,50.013 30.201,50.013
  region net +3.3V: 36.728,31.548 36.728,36.119 37.236,36.627 41.402,36.627 41.58,36.805 41.58,39.218 41.3,39.497 35.128,39.497 34.595,40.03 34.595,47.092 34.9,47.396 51.867,47.396 52.07,47.6 52.07,49.505 31.445,49.505 31.242,49.301 31.242,31.748 31.789,31.204 36.412,31.229
  region net +3.3V: 50.089,55.474 50.089,48.438 52.057,48.438 52.119,55.22 51.868,55.474
  region net +12: 61.57,67.97 61.57,63.475 64.262,63.475 64.592,63.805 64.592,68.021 64.465,68.148 61.747,68.148
  region net +12: 33.249,75.692 33.249,74.092 33.553,73.787 36.195,73.787 36.601,74.193 36.601,74.981 35.89,75.692
  pour cut-out: 34.417,42.367 34.417,39.497 41.605,39.497 41.605,42.367 41.656,42.367
  region net NetC1_1: 48.793,42.316 48.793,43.815 48.692,43.917 46.66,43.917 46.533,44.044 46.533,45.237 46.304,45.466 36.068,45.466 35.89,45.288 35.89,42.621 36.246,42.266 41.808,42.266 42.139,41.935 42.139,36.855 42.342,36.652 43.993,36.652 44.145,36.805 44.145,41.759 44.652,42.266 48.743,42.266
  region: 56.896,26.166 56.896,28.473 56.413,28.956 54.178,28.956 53.238,29.896 53.238,32.817 53.01,33.045 50.622,33.045 50.343,33.325 50.343,38.43 50.292,38.481 49.225,38.481 49.174,38.43 49.174,36.22 48.971,36.017 47.676,36.017 47.396,35.738 47.396,30.023 48.209,29.21 49.403,29.21 49.835,28.778 49.835,26.192 50.067,25.956 56.666,25.935
Bottom Layer:
  region net GND: 41.453,85.928 43.256,85.928 43.256,83.617 41.529,83.617
  region net GND: 47.981,28.806 44.831,28.806 44.831,25.733 47.981,25.733
  region net +12: 50.546,25.959 54.102,25.959 59.385,25.959 59.766,26.34 59.766,67.234 58.268,67.234 57.734,66.7 57.734,30.074 57.429,29.769 50.521,29.769 49.987,29.235 49.987,28.626 49.987,26.518
  region net +12: 56.921,26.213 56.921,28.321 56.439,28.804 54.204,28.804 53.264,29.743 53.264,32.664 52.908,33.02 47.828,33.02 47.422,32.614 47.422,29.87 48.235,29.058 49.428,29.058 49.86,28.626 49.86,26.269 50.181,25.943 56.632,25.923
  region net +12: 57.074,66.04 57.836,65.278 59.715,65.278 60.488,66.051 59.857,66.573
  region net +12: 35.229,74.854 33.579,74.854 33.299,74.574 33.299,66.878 34.442,65.735 62.535,65.735 62.992,66.192 62.992,67.691 62.763,67.92 36.276,67.92 35.512,68.671 35.411,74.675

## Silkscreen, mask and mechanical layers (free items; w line width, h text height)
Top Overlay:
  lines w0.254: 25.4,86.79 25.4,24.79 67.462,24.79 67.462,86.792 25.425,86.792